# EAGLE board BIRDS4_-Y_panel_FM_TSURU_v2 (EAGLE 9.3.1)
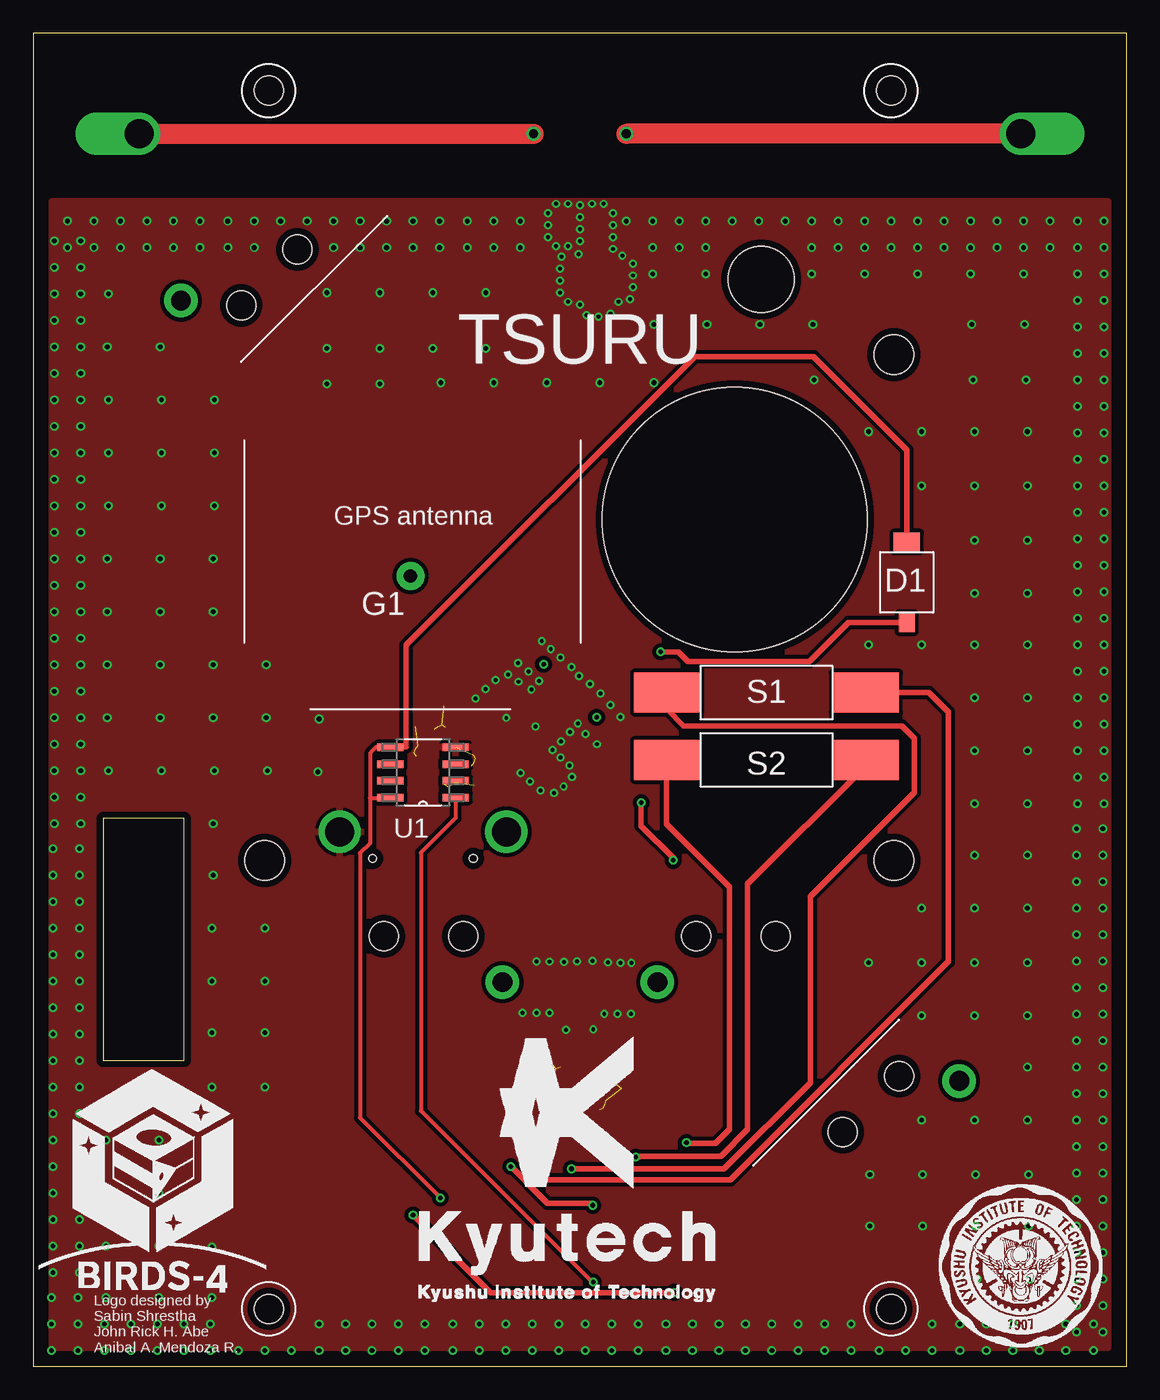
[diagram p0: board, top side]
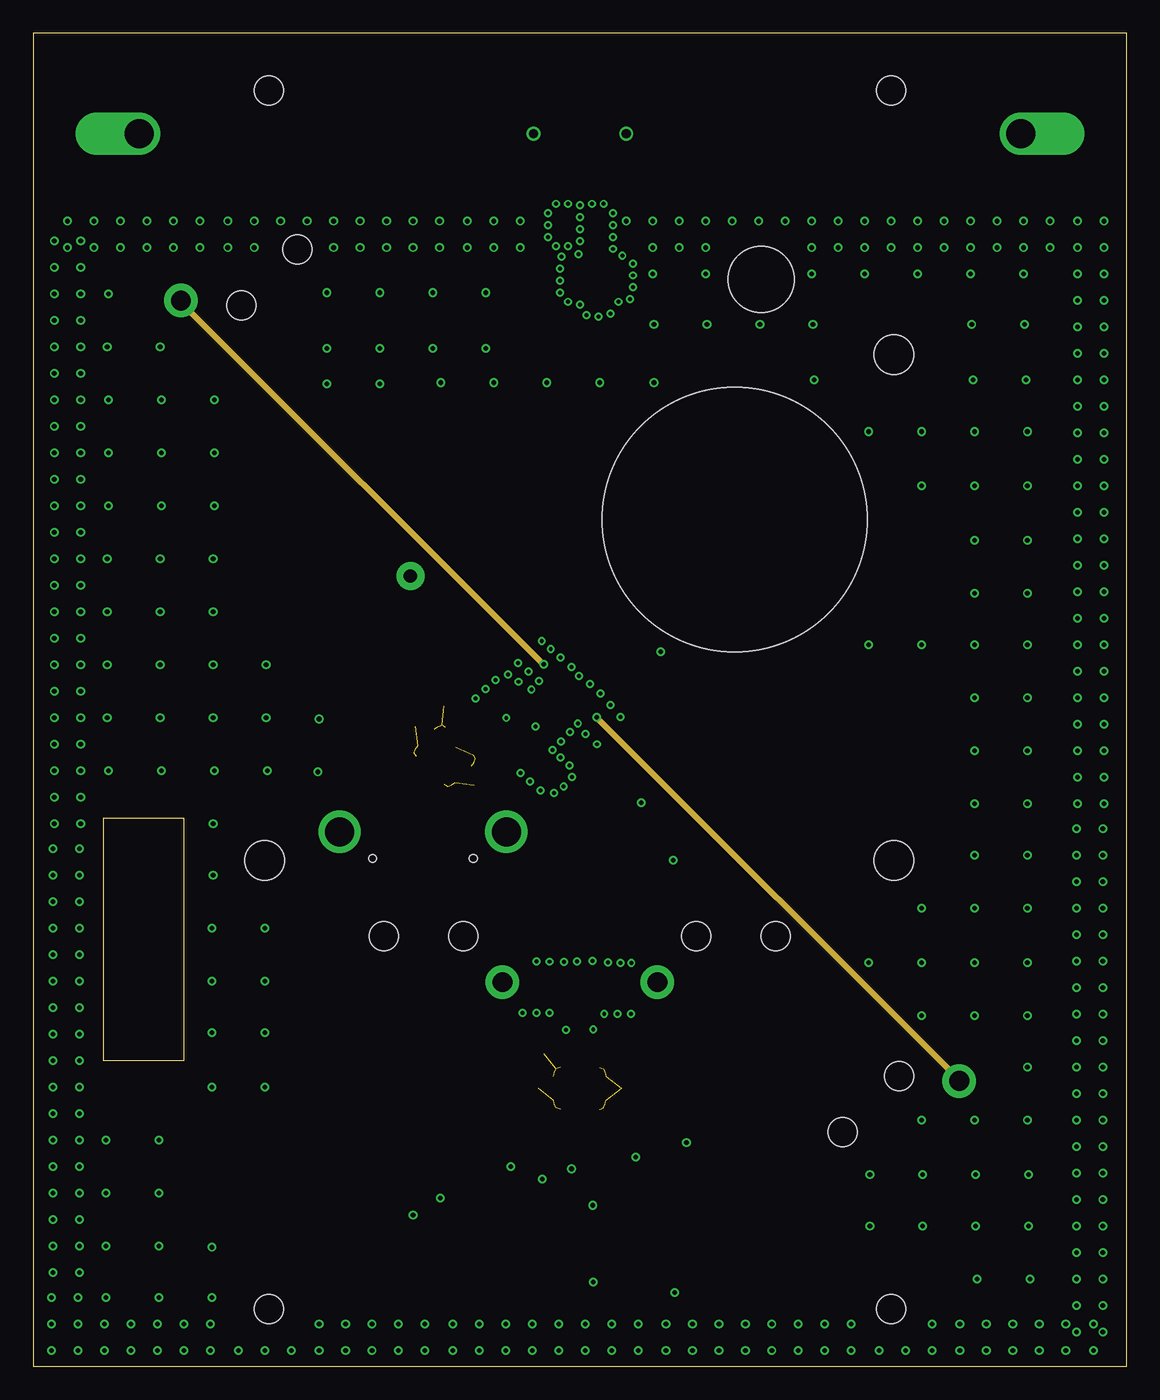
[diagram p1: board, inner layer 2layer]
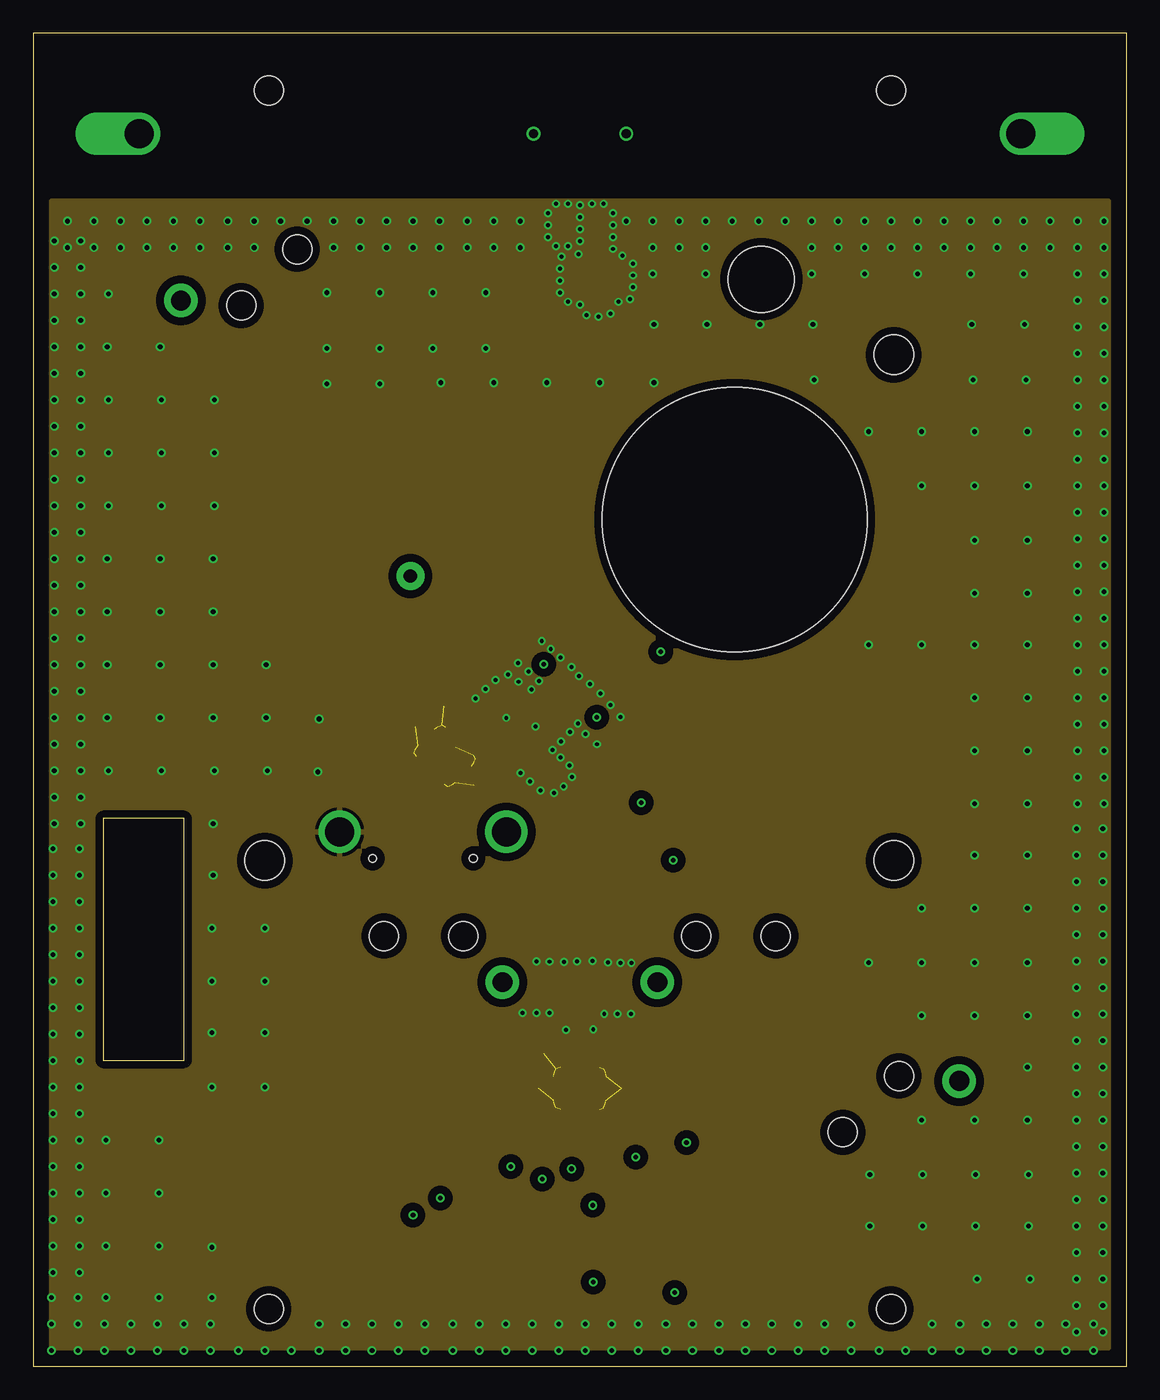
[diagram p2: board, inner layer 5layer]
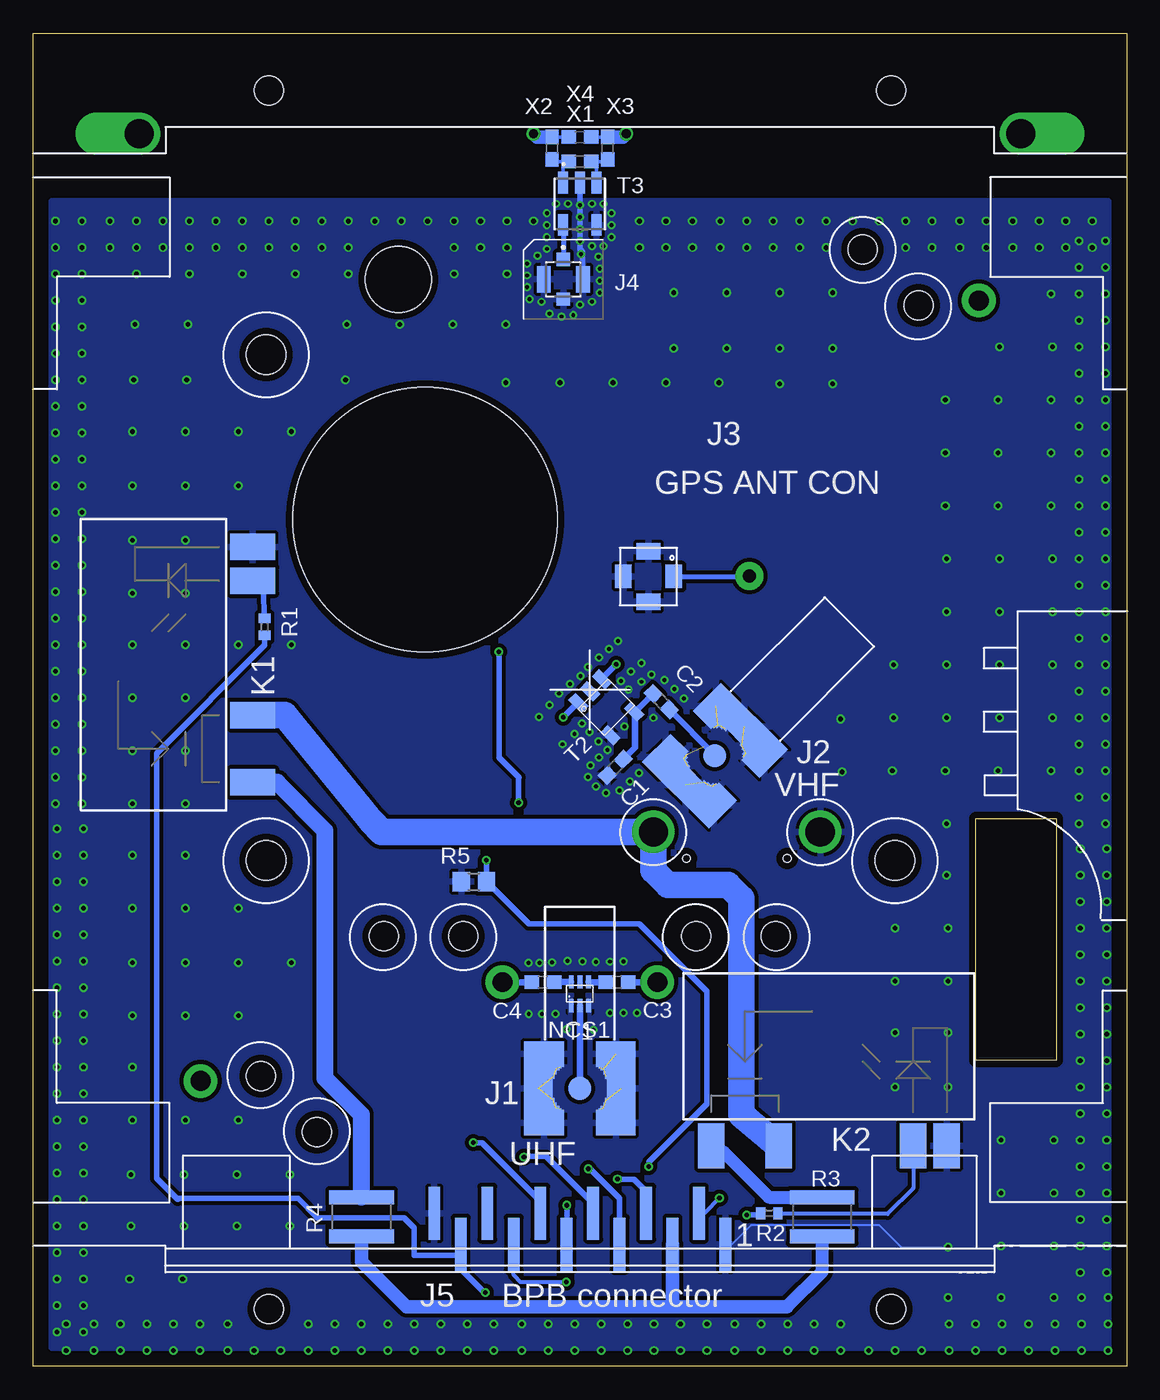
[diagram p3: board, bottom side, seen from below]

Size 82.6 x 100.7 mm. Coordinates in mm from the lower left corner, seen from the top.
Outline: 0,0 41.2,0 82.6,0 82.6,100.7 0,100.7 0,25.7 0,0
Outline: 5.3,23.13 11.4,23.13 11.4,41.38 5.3,41.38 5.3,23.13
Copper layers (1+2*15+16): Top 0.018mm / dielectric 0.25mm / 2layer 0.035mm / dielectric 1mm / 5layer 0.035mm / dielectric 0.25mm / Bottom 0.018mm
Design rules "pban_5mil-l4": minimum track width 5mil, minimum drill 0.3mm, track to track 5mil, track to pad 0.229mm, pad to pad 5mil, via to via 5mil, smd to smd 5mil, copper to edge 0.5mm, drill to drill 0.5mm, minimum pad ring 0.15mm, minimum via ring 0.15mm, stop-mask expansion 4mil, vias tented up to drill 0.35mm, thermal gap 10mil
Holes 2.2 mm at 17.8,96.35 64.8,96.35 64.8,4.35 17.8,4.35
Holes 20 mm at 53,63.95
Holes 0.6 mm at 25.65,38.37 33.25,38.37
Holes 3 mm at 65,76.4 17.5,38.2 65,38.2
Holes 5 mm at 55,82.11

## Footprints (pad centres in the part's own frame; a part is rotated, then mirrored left to right if it is on the bottom)
C1608 = smd 1.1 x 1: 1 -0.85,0; 2 0.85,0
SFH2430 = smd 1.4 x 1.2: P$1 -3.05,0 | smd 1.4 x 2: P$2 3.05,0
B4_FOR_NEW_DIPOLE = drill 1.5 pad 2.54: P$2 0.05,0.02 | hole 2.2: 3,3.5; 9,3.5
GPS_HOLE = drill 1 pad 2.1: GPS_HOLE 0,0
HOLE = drill 2.2 pad 3 offset: 1 0,0
SMA_142_0711_301 = smd 1.73 x 1.73: P$1 0,0 | smd 3 x 1.92: P$2 -2.71,2.6; P$4 -2.71,-2.6; P$5 2.71,-2.6; P$6 2.71,2.6 | smd 2.16 x 3.28: P$3 -3.13,0; P$7 3.13,0 | smd 0.5 x 0.3: P$8 -1.8,1.49; P$9 -1.8,-1.49; P$10 1.8,-1.49; P$11 1.8,1.49 | smd 0.28 x 0.3: P$12 -1.91,1.19; P$13 -1.91,-1.19; P$14 1.91,-1.19; P$15 1.91,1.19 | smd 0.14 x 0.3: P$16 -1.98,0.89; P$17 -1.98,-0.89; P$18 1.98,-0.89; P$19 1.98,0.89 | smd 0.16 x 0.14: P$20 -1.47,1.57; P$21 -1.47,-1.57; P$22 1.47,-1.57; P$23 1.47,1.57
MMCX_GPS = smd 1.27 x 1.778: P$1 -1.905,0; P$3 1.905,0 | smd 1.778 x 1.27: P$2 0,-1.905; P$4 0,1.905
R302302000 = smd 1 x 1: 1 0,-1.5; 3 0,1.5 | smd 1.05 x 2: 2 1.475,0; 4 -1.475,0
HEADER12PIN = smd 4 x 0.89: P1 -1.175,-11; P2 1.175,-9; P3 -1.175,-7; P4 1.175,-5; P5 -1.175,-3; P6 1.175,-1; P7 -1.175,1; P8 1.175,3; P9 -1.175,5; P10 1.175,7; P11 -1.175,9; P12 1.175,11
AQZ10X = smd 3.4 x 2: IN+ 0,-6.35; IN- 0,-8.89; OUT+ 0,8.89; OUT- 0,3.81
NCS1.5-232+ = smd 0.36 x 1: P$1 -0.66,-0.9; P$2 0,-0.9; P$3 0.66,-0.9; P$4 0.66,0.9; P$5 0,0.9; P$6 -0.66,0.9
R0402 = smd 0.7 x 0.9: 1 -0.65,0; 2 0.65,0
R1218 = smd 1.05 x 4.9: 1 -1.475,0; 2 1.475,0
R0805 = smd 1.3 x 1.5: 1 -0.95,0; 2 0.95,0
PEROVSKITE = smd 3 x 5: P$1 0,7.5; P$2 0,-7.5
TC1.5-52T+ = smd 0.76 x 1.65: 1 -1.27,1.59; 2 0,1.59; 3 1.27,1.59; 4 1.27,-1.59; 6 -1.27,-1.59
SOIC_N = smd 1.981 x 0.559: 1 -2.464,1.905; 2 -2.464,0.635; 3 -2.464,-0.635; 4 -2.464,-1.905; 5 2.464,-1.905; 6 2.464,-0.635; 7 2.464,0.635; 8 2.464,1.905
NICR_HOLE = drill 2.2 pad 3: P$1 0,0
MABA-010245-CT1160 = smd 0.762 x 1.397: P$1 -1.27,1.714; P$2 0,1.714; P$3 1.27,1.714; P$4 1.27,-1.714; P$6 -1.27,-1.714

## Placement (x,y rotation side)
C1  [C1608]  38.63,45.25 225 bottom
C2  [C1608]  35.15,50.21 315 bottom
C3  [C1608]  38.5,29.02 180 bottom
C4  [C1608]  44.1,29.02 0 bottom
D1  SFH2430  [SFH2430]  65.99,59.22 90 top
HOLE1  B4_FOR_NEW_DIPOLE  [B4_FOR_NEW_DIPOLE]  35.5,29 0 bottom
HOLE2  B4_FOR_NEW_DIPOLE  [B4_FOR_NEW_DIPOLE]  47.1,29 0 top
HOLE7  GPS_HOLE  [GPS_HOLE]  28.5,59.7 0 top
HOLE8  CUBESAT_RAIL  [HOLE]  74.6,93.1 0 top
HOLE9  CUBESAT_RAIL  [HOLE]  8,93.1 180 top
J1  SMA_142_0711_301  [SMA_142_0711_301]  41.3,21 0 bottom
J2  SMA_142_0711_301  [SMA_142_0711_301]  31.1,46.12 45 bottom
J3  MMCX_GPS  [MMCX_GPS]  36.12,59.66 270 bottom
J4  HNT RF CON  [R302302000]  42.55,82.11 180 bottom
J5  HEADER12PIN  [HEADER12PIN]  41.3,10.4 90 bottom
K1  AQZ10X  [AQZ10X]  66.01,53 180 bottom
K2  AQZ10X  [AQZ10X]  22.48,16.67 90 bottom
NCS1  NCS1.5-232+  [NCS1.5-232+]  41.3,28.14 0 bottom
R1  240  [R0402]  65.11,55.86 90 bottom
R2  240  [R0402]  27,11.57 0 bottom
R3  1  [R1218]  23,11.3 90 bottom
R4  1  [R1218]  57.79,11.3 90 bottom
R5  [R0805]  49.3,36.61 0 bottom
S1  PEROVSKITE  [PEROVSKITE]  55.4,50.89 90 top
S2  PEROVSKITE  [PEROVSKITE]  55.4,45.81 90 top
T3  TC1-1T+  [TC1.5-52T+]  41.3,87.8 0 bottom
U1  TMP36FSZ  [SOIC_N]  29.45,44.86 180 top
U$1  NICR_HOLE  [NICR_HOLE]  35.75,40.37 0 top
U$2  MABA-010245-CT1160  [MABA-010245-CT1160]  39.31,49.78 45 bottom
U$3  B4_FOR_NEW_DIPOLE  [B4_FOR_NEW_DIPOLE]  70,21.58 315 bottom
U$4  B4_FOR_NEW_DIPOLE  [B4_FOR_NEW_DIPOLE]  11.12,80.48 135 bottom
U$5  NICR_HOLE  [NICR_HOLE]  23.15,40.37 0 top
X1  [C1608]  41.3,91 180 bottom
X2  [C1608]  43.4,92 90 bottom
X3  [C1608]  39.2,92 90 bottom
X4  [C1608]  41.3,92.85 180 bottom

## Library data of the parts
C1-C4 R1 R2 = adafruit_ufl
D1 S1 S2 = BIRDS_4_general_components_library
HOLE1 HOLE2 U$3 U$4 = b4_for_new_dipole
HOLE7 = GPS_hole
HOLE8 HOLE9 = Structure-hole-BIRDS4-HNT
J1 J2 = SMA_142_0711_301
J3 = MMCX_GPS
J4 = R302302000; DESCRIPTION: Radiall Straight Miniature 50 PCB Mount MML Connector, Receptacle, Solder Termination Coaxial; HEIGHT: 1.3mm; MANUFACTURER_NAME: Radiall; MANUFACTURER_PART_NUMBER: R302302000; RS_PART_NUMBER: 1250330; RS_PRICE-STOCK: http://uk.rs-online.com/web/p/products/1250330
J5 = exturnal_panel_lib; SPICEPREFIX: X
K1 K2 = b4_photomos
NCS1 = NCS1.5-232+
R3-R5 = rcl; SPICEPREFIX: R
T3 = TC1-1T+; DESCRIPTION: RF Transformer; HEIGHT: mm; MANUFACTURER_NAME: Mini-Circuits; MANUFACTURER_PART_NUMBER: TC1-1T+
U1 = TMP36FSZ
U$1 U$5 = Nicr_hole
U$2 = MABA-010245-CT1160
X1-X4 = Matching_Component

## Nets
3V3_1: D1.P$2 J5.P2 U1.5 U1.8
-X_TEMP_OUT: J5.P9 U1.1
GND: C1.2 J1.P$2 J1.P$3 J1.P$4 J1.P$5 J1.P$6 J1.P$7 J1.P$8 J1.P$9 J1.P$10 J1.P$11 J1.P$12 J1.P$13 J1.P$14 J1.P$15 J1.P$16 J1.P$17 J1.P$18 J1.P$19 J1.P$20 J1.P$21 J1.P$22 J1.P$23 J2.P$2 J2.P$3 J2.P$4 J2.P$5 J2.P$6 J2.P$7 J2.P$8 J2.P$9 J2.P$10 J2.P$11 J2.P$12 J2.P$13 J2.P$14 J2.P$15 J2.P$16 J2.P$17 J2.P$18 J2.P$19 J2.P$20 J2.P$21 J2.P$22 J2.P$23 J3.P$1 J3.P$2 J3.P$3 J4.2 J4.3 J4.4 J5.P1 J5.P12 K1.IN- K2.IN- NCS1.P$1 NCS1.P$3 R5.1 T3.2 T3.4 U1.4 U$2.P$6 U$5.P$1
HOT: K1.OUT- K2.OUT- U$1.P$1
MAIN_PIC_DIO: J5.P11 R1.1 R2.1
N$1: K1.IN+ R1.2
N$2: K1.OUT+ R4.2
N$3: K2.IN+ R2.2
N$4: C4.1 HOLE2.P$2
N$5: C2.2 J2.P$1
N$6: C1.1 C2.1 U$2.P$4
N$7: U$2.P$1 U$3.P$2
N$8: U$2.P$3 U$4.P$2
N$9: T3.1 X1.2 X2.1
N$10: C3.1 HOLE1.P$2
N$11: C4.2 NCS1.P$6
N$12: C3.2 NCS1.P$4
N$13: J1.P$1 NCS1.P$2
N$14: T3.3 X1.1 X3.1
N$16: J4.1 T3.6
N$17: HOLE8.1 X2.2 X4.2
N$18: HOLE9.1 X3.2 X4.1
N$20: K2.OUT+ R3.2
N$33: HOLE7.GPS_HOLE J3.P$4
PHOTODIODE: D1.P$1 J5.P7 R5.2
PSC1+: J5.P5 S1.P$1
PSC1-: J5.P4 S1.P$2
PSC2+: J5.P8 S2.P$1
PSC2-: J5.P6 S2.P$2
SUP_UNREG: J5.P3 R3.1 R4.1

## Tracks (layer width: path | path; a pad name or v marks a point on that pad's centre or on a via)
3V3_1  (via drill 0.35)
  Top 0.305: U1.5 25.9,46.77 25.56,46.43 25.46,46.3 25.46,42.94 | 25.46,42.94 25.44,42.94 25.44,39.51 24.7,38.76 24.7,18.78 v30.76,12.72 | 25.46,42.94 U1.8
  Top 0.406: U1.5 28.19,46.77 28.19,54.48 49.99,76.28 58.93,76.28 65.99,69.22 D1.P$2
  Bottom 0.305: v30.76,12.72 31.91,11.57 J5.P2
-X_TEMP_OUT  (via drill 0.35)
  Top 0.305: U1.1 31.91,41.42 29.3,38.81 29.3,19.3 42.32,6.28 v42.32,6.37
  Bottom 0.305: v42.32,6.37 45.77,6.37 46.3,6.91 J5.P9
GND  (via drill 0.3, 0.3 pad 0.6, 0.35)  (32 unrouted)
  Bottom 0.152: v13.5,9 17.01,9 18.66,10.65 28.37,10.65 29.8,9.22 J5.P1
  Bottom 0.4: 41.3,82.33 J4.4 41.1,82.14 41.1,84.2 41.3,84.4 v41.3,85 v41.3,85.9 v41.3,86.8 v41.3,87.7 T3.2
  other vias: 38.42,54.79 39.1,54.18 39.84,53.53 42.86,50.81 43.6,49.94 44.37,49.05 36.64,53.13 37.43,52.47 38.2,51.77 41.14,48.57 41.71,47.77 42.6,46.99 40.68,52.83 41.25,52.14 42.06,51.53 36.98,26.7 38.01,26.7 39.01,26.69 43.14,26.64 44.15,26.64 45.16,26.63 39.5,87.8 40.4,87.8 41.2,84 40.4,84.6 39.9,83.8 39.8,82.9 39.8,82 39.8,81.1 40.4,80.4 41.3,80.2 41.8,79.4 42.7,79.3 43.6,79.5 44.2,80.4 45.1,80.6 45.3,81.5 45.3,82.4 45.3,83.3 44.5,83.9 43.8,84.4 43.8,85.3 43.8,86.2 43.8,87.1 43.1,87.8 42.2,87.8 38.9,87.1 38.9,86.2 38.9,85.3 39.5,84.6 80.9,42.5 78.9,42.5 80.9,44.5 78.9,44.5 78.9,46.5 80.9,46.5 78.9,48.5 80.9,48.5 80.9,50.5 78.9,50.5 78.9,52.5 80.9,52.5 80.9,54.5 78.9,54.5 78.9,56.5 80.9,56.5 80.9,58.5 78.9,58.5 78.9,60.5 80.9,60.5 78.9,62.5 80.9,62.5 80.9,64.5 78.9,64.5 80.9,66.5 78.9,66.5 78.9,68.5 80.9,68.5 80.9,70.5 78.9,70.5 78.9,72.5 80.9,72.5 80.9,74.5 78.9,74.5 78.9,76.5 80.9,76.5 78.9,78.5 80.9,78.5 80.9,80.5 78.9,80.5 78.9,82.5 80.9,82.5 78.9,84.5 80.9,84.5 78.9,86.5 80.9,86.5 12.6,86.5 12.6,84.5 10.6,86.5 10.6,84.5 8.6,84.5 8.6,86.5 6.6,84.5 6.6,86.5 4.6,86.5 4.6,84.5 2.6,84.5 2.6,86.5 30.7,86.5 30.7,84.5 28.7,86.5 28.7,84.5 26.7,84.5 26.7,86.5 24.7,84.5 24.7,86.5 22.7,86.5 22.7,84.5 20.7,86.5 18.7,86.5 16.7,84.5 16.7,86.5 14.7,86.5 14.7,84.5 76.8,86.5 76.8,84.5 74.8,86.5 74.8,84.5 72.8,84.5 72.8,86.5 70.8,84.5 70.8,86.5 68.8,86.5 68.8,84.5 66.8,84.5 66.8,86.5 64.8,86.5 64.8,84.5 62.8,84.5 62.8,86.5 60.8,86.5 60.8,84.5 58.8,84.5 58.8,86.5 56.8,86.5 54.8,86.5 52.8,86.5 50.8,84.5 50.8,86.5 48.8,86.5 48.8,84.5 46.8,84.5 46.8,86.5 44.8,86.5 36.8,86.5 34.8,86.5 32.8,86.5 36.8,84.5 34.8,84.5 32.8,84.5 78.8,2.6 80.8,2.6 80.8,4.6 78.8,4.6 78.8,6.6 80.8,6.6 80.8,8.6 78.8,8.6 78.8,10.6 80.8,10.6 80.8,12.6 78.8,12.6 78.8,14.6 80.8,14.6 78.8,16.6 80.8,16.6 80.8,18.6 78.8,18.6 80.8,20.6 78.8,20.6 78.8,22.6 80.8,22.6 80.8,24.6 78.8,24.6 78.8,26.6 80.8,26.6 80.8,28.6 78.8,28.6 78.8,30.6 80.8,30.6 78.8,32.6 80.8,32.6 80.8,34.6 78.8,34.6 78.8,36.6 80.8,36.6 78.8,38.6 80.8,38.6 78.8,40.6 80.8,40.6 67.1,66.5 71.1,66.5 75.1,66.5 67.1,70.6 71.1,70.6 75.1,70.6 63.1,70.6 71,74.5 75,74.5 59,74.5 46.9,74.3 70.9,78.7 74.9,78.7 58.9,78.7 54.9,78.7 50.9,78.7 46.9,78.7 66.8,82.5 70.8,82.5 74.8,82.5 62.8,82.5 58.8,82.5 50.8,82.5 46.8,82.5 78,3.2 78,1.2 76,3.2 76,1.2 74,1.2 74,3.2 72,1.2 72,3.2 70,3.2 70,1.2 80.1,3.2 80.1,1.2 67.9,3.2 67.9,1.2 65.9,1.2 63.9,1.2 61.8,3.2 61.8,1.2 59.8,3.2 59.8,1.2 57.8,1.2 57.8,3.2 55.8,1.2 55.8,3.2 53.8,3.2 53.8,1.2 45.7,3.2 45.7,1.2 43.7,3.2 43.7,1.2 41.7,1.2 41.7,3.2 39.7,1.2 39.7,3.2 37.7,3.2 37.7,1.2 51.8,3.2 49.8,3.2 47.8,3.2 51.8,1.2 49.8,1.2 47.8,1.2 29.6,3.2 29.6,1.2 27.6,3.2 27.6,1.2 25.6,1.2 25.6,3.2 23.6,1.2 23.6,3.2 21.6,3.2 21.6,1.2 35.7,3.2 33.7,3.2 31.7,3.2 35.7,1.2 33.7,1.2 31.7,1.2 13.4,3.2 13.4,1.2 11.4,3.2 11.4,1.2 9.4,1.2 9.4,3.2 7.4,1.2 7.4,3.2 5.4,3.2 5.4,1.2 19.5,1.2 17.5,1.2 15.5,1.2 3.6,41 1.6,41 3.6,43 1.6,43 1.6,45 3.6,45 1.6,47 3.6,47 3.6,49 1.6,49 1.6,51 3.6,51 3.6,53 1.6,53 1.6,55 3.6,55 3.6,57 1.6,57 1.6,59 3.6,59 1.6,61 3.6,61 3.6,63 1.6,63 3.6,65 1.6,65 1.6,67 3.6,67 1.5,35.1 3.5,35.1 1.5,37.1 3.5,37.1 1.5,39.1 3.5,39.1 1.6,69 3.6,69 3.6,71 1.6,71 1.6,73 3.6,73 3.6,75 1.6,75 1.6,77 3.6,77 1.6,79 3.6,79 3.6,81 1.6,81 3.6,83 1.6,83 1.6,85 3.6,85 3.5,7.1 1.5,7.1 3.5,9.1 1.5,9.1 1.5,11.1 3.5,11.1 1.5,13.1 3.5,13.1 3.5,15.1 1.5,15.1 1.5,17.1 3.5,17.1 3.5,19.1 1.5,19.1 1.5,21.1 3.5,21.1 3.5,23.1 1.5,23.1 1.5,25.1 3.5,25.1 1.5,27.1 3.5,27.1 3.5,29.1 1.5,29.1 3.5,31.1 1.5,31.1 1.5,33.1 3.5,33.1 1.4,1.2 3.4,1.2 1.4,3.2 3.4,3.2 1.4,5.2 3.4,5.2 71.1,62.4 75.1,62.4 71.1,58.4 75.1,58.4 67.1,54.5 71.1,54.5 75.1,54.5 63.1,54.5 13.7,69 5.7,69 9.7,69 13.7,65 5.7,65 9.7,65 13.6,61 5.6,61 9.6,61 71.1,50.5 75.1,50.5 71.1,46.5 75.1,46.5 71.1,42.5 75.1,42.5 71.1,38.6 75.1,38.6 67.1,34.6 71.1,34.6 75.1,34.6 67.1,30.5 71.1,30.5 75.1,30.5 63.1,30.5 67.1,26.5 71.1,26.5 75.1,26.5 71.1,18.6 75.1,18.6 67.1,18.6 75.1,22.6 63.2,14.5 67.2,14.5 71.2,14.5 75.2,14.5 71.2,10.6 75.2,10.6 63.2,10.6 67.2,10.6 71.3,6.6 75.3,6.6 5.5,5.2 9.5,5.2 5.5,9.1 9.5,9.1 5.5,17.1 9.5,17.1 5.5,13.1 9.5,13.1 13.5,21.1 17.5,21.1 13.5,25.2 17.5,25.2 13.5,29.1 17.5,29.1 13.5,33.1 17.5,33.1 13.6,37.1 13.6,41 5.7,45 9.7,45 13.7,45 17.7,45 13.6,49 17.6,49 5.6,49 9.6,49 13.6,53 17.6,53 5.6,53 9.6,53 13.6,57 5.6,57 9.6,57 5.7,81 5.6,77 9.6,77 13.7,73 5.7,73 9.7,73 21.5,44.9 21.6,48.9 13.5,5.2 26.2,74.2 22.2,74.2 42.8,74.3 38.8,74.3 34.8,74.3 30.8,74.3 34.2,76.9 30.2,76.9 26.2,76.9 22.2,76.9 34.2,81.1 30.2,81.1 26.2,81.1 22.2,81.1 40.56,47.91 39.89,47.21 39.23,46.55 39.85,45.98 40.5,45.38 39.33,43.3 38.31,43.51 37.53,44.17 36.83,44.82 37.63,51.13 35.88,52.26 34.92,51.85 34.17,51.15 33.43,50.46 35.74,48.99 37.94,48.33 38.02,30.6 39.02,30.57 40.1,30.55 41.09,30.59 42.25,30.63 43.42,30.5 44.35,30.48 45.18,30.48 36.66,51.71 40.08,43.81 40.69,44.52 40.26,25.43 42.31,25.46
  pour Bottom (isolate 0.305): 1.4,88 81.2,88 81.2,1.4 1.4,1.4
  pour Top (isolate 0.305): 1.4,88 1.4,1.4 81.2,1.4 81.2,88
  pour 5layer (isolate 0.6): 1.4,88 1.4,1.4 81.2,1.4 81.2,88
HOT
  Bottom 2: K1.OUT- 63.59,49.19 57.08,41.18 56.27,40.37 U$1.P$1 35.75,37.47 34.63,36.35 30.12,36.35 29.1,35.33 29.1,18.98 K2.OUT-
MAIN_PIC_DIO  (via drill 0.35)
  Top 0.406: v28.7,11.44 34.57,5.57 48.46,5.57 v48.45,5.58 v48.45,5.59
  Bottom 0.406: R1.1 65.11,54.47 73.28,46.3 73.28,14.21 71.69,12.62 71.62,12.69 62.6,12.69 61.13,11.22 54.59,11.22 53.83,10.46 53.83,8.38 50.18,8.38 50.3,8.5 J5.P11 50.3,7.36 48.53,5.59 v48.45,5.59 | R2.1 27.78,11.44 v28.7,11.44
N$1
  Bottom 0.406: K1.IN+ 65.18,58.52 65.17,56.56 R1.2
N$2
  Bottom 1.27: R4.2 57.79,19.01 60.55,21.77 60.55,40.45 64.16,44.11 K1.OUT+
N$3
  Bottom 0.305: K2.IN+ 16.13,13.45 18.06,11.52 26.3,11.52 R2.2
N$4
  Bottom 0.5: C4.1 HOLE2.P$2
N$5
  Bottom 0.5: C2.2 31.13,46.19 J2.P$1
N$6
  Bottom 0.5: C2.1 37.1,49.47 U$2.P$4 37.13,49.4 37.13,46.75 C1.1
N$7  (via drill 0.35)
  2layer 0.5: U$3.P$2 69.95,21.63 v42.56,49.02
  Bottom 0.5: v42.56,49.02 41.49,50.09 U$2.P$1
N$8  (via drill 0.35)
  2layer 0.5: v38.56,53.02 11.17,80.33 U$4.P$2
  Bottom 0.5: U$2.P$3 39.62,51.96 v38.56,53.02
N$9
  Bottom 0.254: T3.1 42.57,90.58 X1.2 43.25,91 X2.1
N$10
  Bottom 0.5: HOLE1.P$2 C3.1
N$11
  Bottom 0.5: NCS1.P$6 43.23,29.04 C4.2
N$12
  Bottom 0.5: C3.2 40.62,29.02 NCS1.P$4
N$13
  Bottom 0.5: NCS1.P$2 J1.P$1
N$14
  Bottom 0.254: T3.3 40.03,90.58 X1.1 39.35,91 X3.1
N$16
  Bottom 0.37: 42.55,86.21 J4.1
  Bottom 0.6: T3.6 42.55,86.21
N$17  (via drill 0.7)
  Top 1.5: HOLE8.1 v44.8,93.1
  Bottom 0.254: X4.2 X2.2
  Bottom 1.016: X2.2 44.55,92.85 v44.8,93.1
N$18  (via drill 0.7)
  Top 1.5: HOLE9.1 v37.8,93.1
  Bottom 0.254: X3.2 X4.1
  Bottom 1.016: X3.2 38.05,92.85 v37.8,93.1
N$20
  Bottom 1: R3.2 27.04,12.78 30.43,16.17 K2.OUT+
N$33
  Bottom 0.152: 28.54,59.66 HOLE7.GPS_HOLE
  Bottom 0.38: J3.P$4 28.54,59.66
PHOTODIODE  (via drill 0.35)
  Top 0.406: v45.93,42.58 45.93,40.83 48.4,38.36 48.4,38.22 v48.36,38.22 | v36.09,15.1 38.86,12.33 42.3,12.33 42.3,12.19 v42.28,12.17 | D1.P$1 61.57,56.17 58.65,53.25 49.47,53.25 48.76,53.97 v47.42,53.97
  Bottom 0.406: v36.09,15.1 36.09,15.46 31.71,19.84 31.71,28.33 36.79,33.41 45.15,33.41 R5.2 v48.35,38.21 v48.36,38.22 | v42.28,12.17 42.28,9.24 J5.P7 | v47.42,53.97 47.42,45.99 45.91,44.48 45.93,44.45 v45.93,42.58
PSC1+  (via drill 0.35)
  Top 0.406: S1.P$1 47.94,50.85 47.94,49.56 49.14,48.36 65.61,48.36 66.55,47.42 66.55,43.35 58.71,35.51 58.71,21.43 52.2,14.92 v40.67,14.92
  Bottom 0.406: v40.67,14.92 40.54,14.92 38.3,12.68 J5.P5
PSC1-  (via drill 0.35)
  Top 0.406: S1.P$2 66.42,50.89 66.44,50.91 67.66,50.91 69.13,49.44 69.13,30.54 69.11,30.54 52.67,14.1 38.5,14.1 v38.46,14.14
  Bottom 0.406: v38.46,14.14 37.22,14.14 36.3,13.22 J5.P4
PSC2+  (via drill 0.35)
  Top 0.406: S2.P$1 47.84,45.75 47.84,40.97 52.6,36.21 52.6,17.91 51.55,16.86 49.39,16.86 v49.35,16.9
  Bottom 0.406: J5.P8 44.3,12.51 48.69,16.9 v49.35,16.9
PSC2-  (via drill 0.35)
  Top 0.406: v45.52,15.8 45.67,15.8 45.75,15.88 51.95,15.88 53.97,17.9 53.97,36.43 62.78,45.24 S2.P$2
  Bottom 0.406: v45.52,15.8 45.52,15.85 43.84,15.85 40.3,12.31 J5.P6
SUP_UNREG
  Bottom 1: 25.65,4.5 23,7.15 R3.1
  Bottom 1.016: R4.1 57.79,7.89 54.4,4.5 34.33,4.5 | 34.33,4.5 25.65,4.5 | J5.P3 34.3,4.53 34.33,4.5

## Text on the board
tPlace: TSURU | GPS antenna | Logo designed by / Sabin Shrestha / John Rick H. Abe / Anibal A. Mendoza R.
bPlace: 1
tNames: D1 | G1 | S1 | S2
bNames: J3 | GPS ANT CON | J2 | T2 | VHF | T1 | J1 | UHF | J5 | BPB connector